# Altium PCB power reg.PcbDoc
Units mil, origin at the board's own origin, x right, y up, seen from the top; angles counter-clockwise.
Board outline 2875 x 1655 mil, 2 copper layers (Top Layer, Bottom Layer); 8 components, 5 nets, 24 pads, 0 vias.
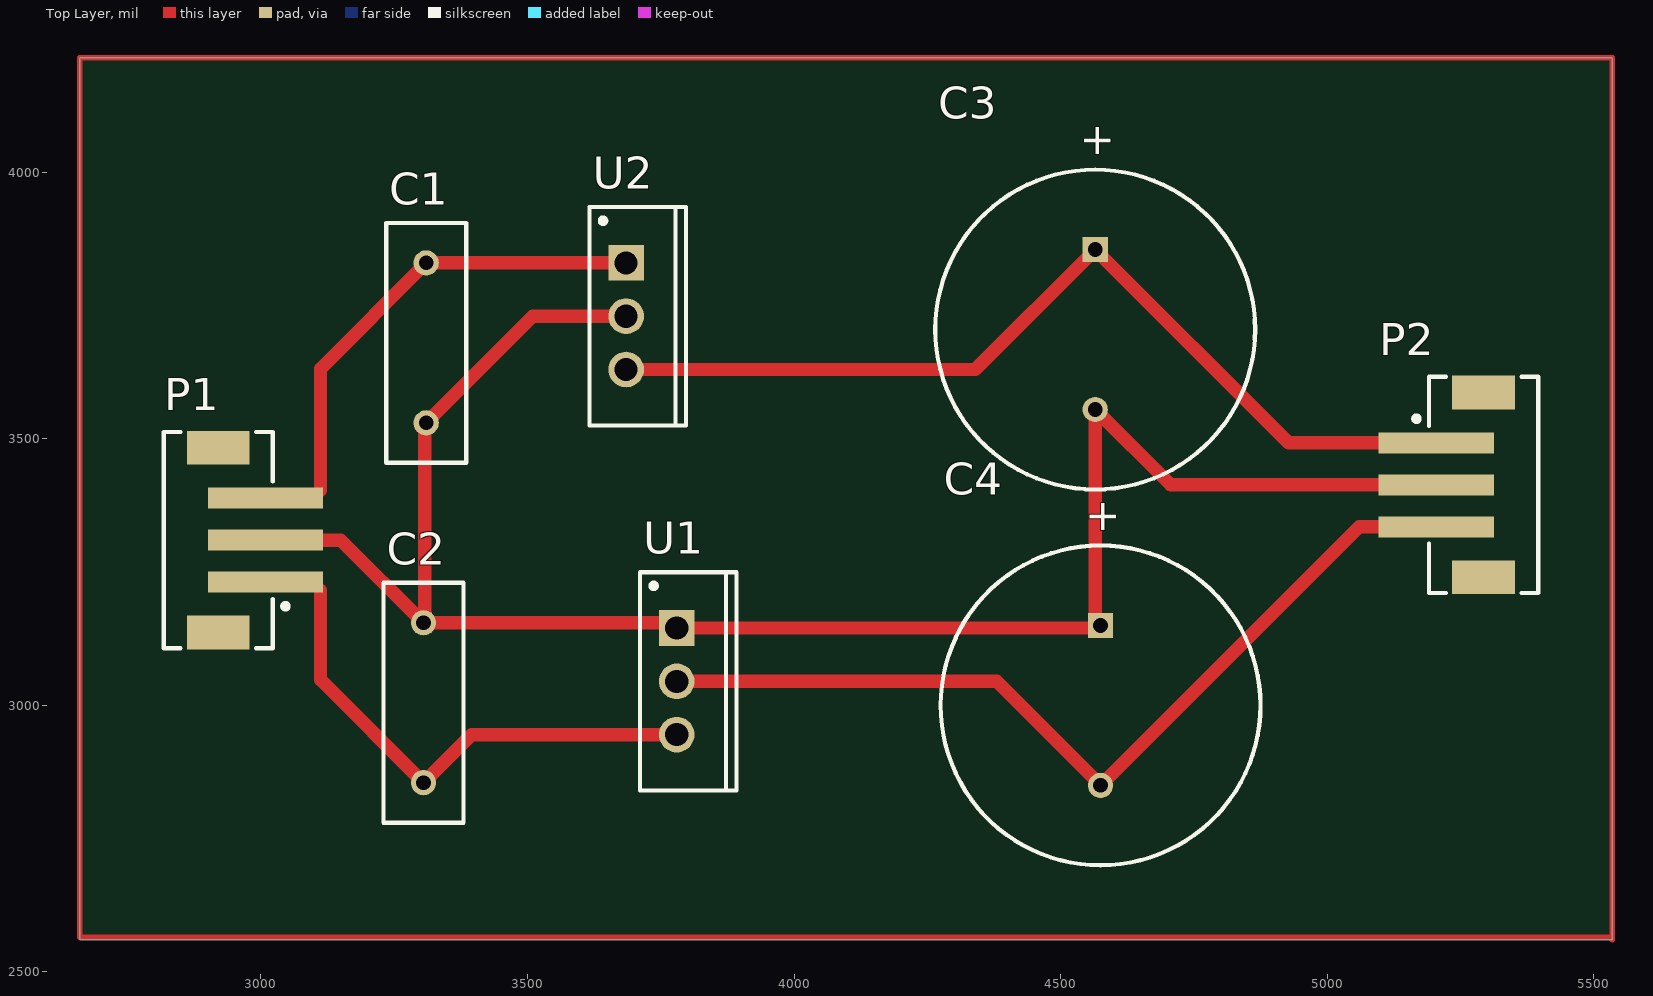
[diagram p0: Top Layer view]
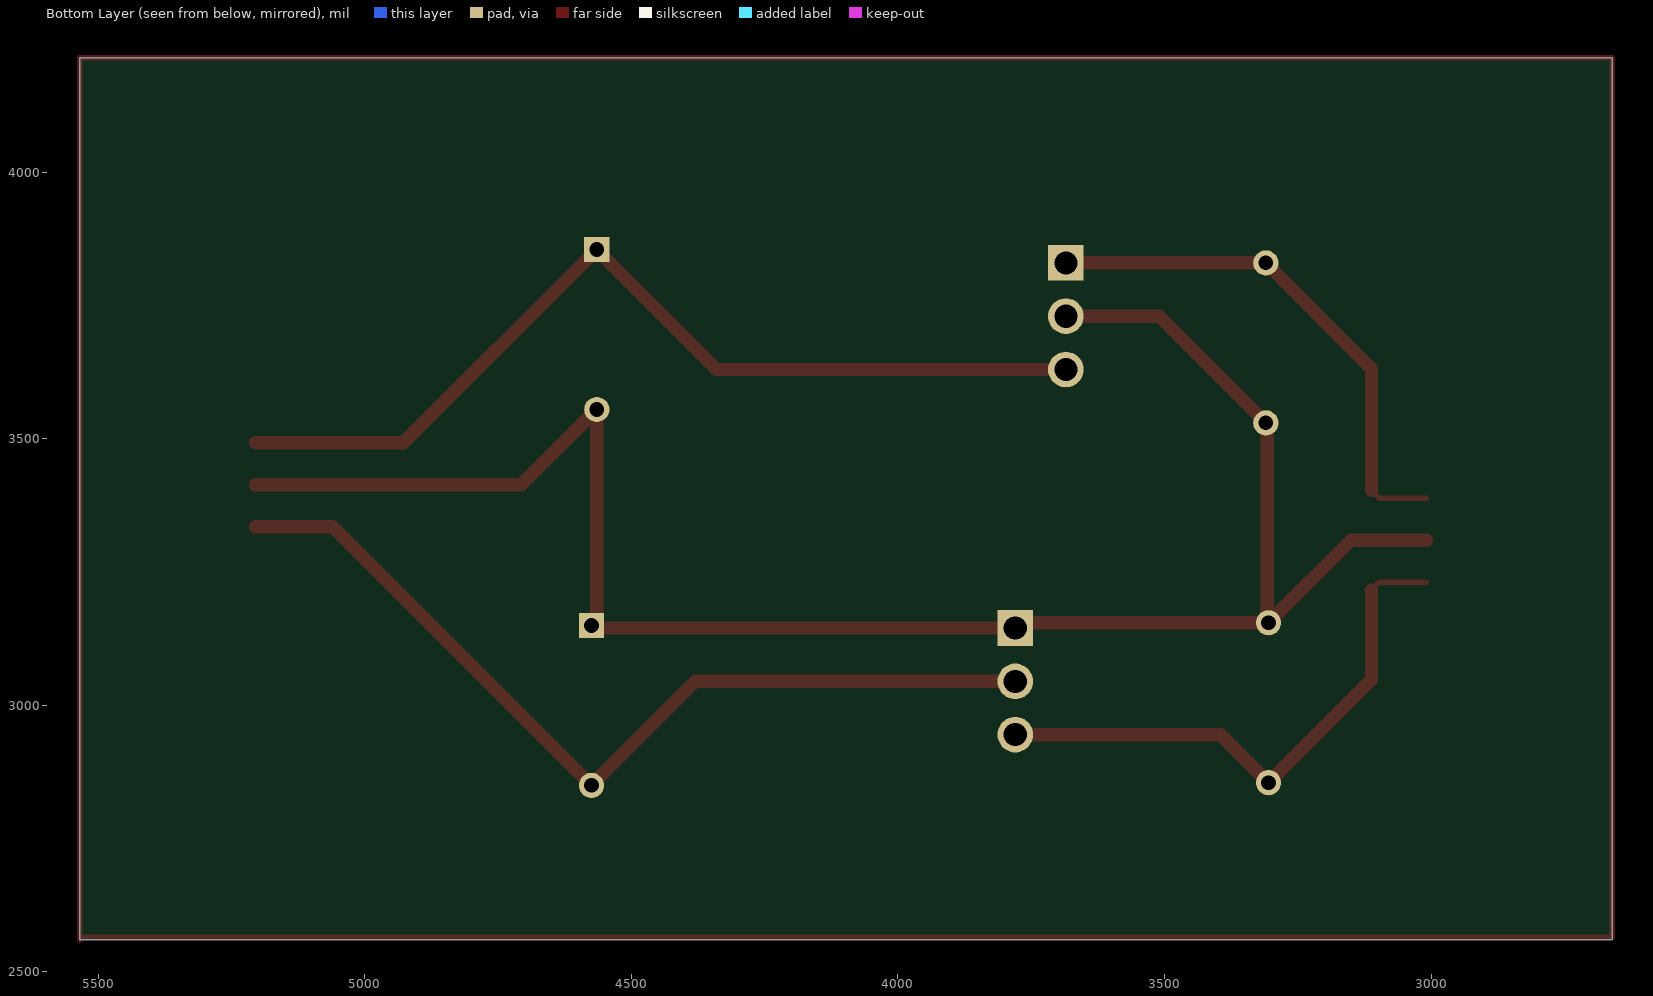
[diagram p1: Bottom Layer view, seen from below]

## Layer stack, top to bottom
Top Solder: solder mask 0.4, Solder Resist, Dk 3.5
Top Layer: signal copper 1.4
Dielectric 1: dielectric 12.6, FR-4, Dk 4.8
Bottom Layer: signal copper 1.4
Bottom Solder: solder mask 0.4, Solder Resist, Dk 3.5

## Board outline
2660,2560 5535,2560 5535,4215 2660,4215

## Design rules (kind name [scope] priority, off if disabled: settings)
Clearance "Clearance Bottom Layer" [OnLayer('Bottom Layer')] p1: gap=8 ignorepadtopadclearanceinfootprint=TRUE except(10: Arc-Text Track-Text SMDPad-Text THPad-Text Via-Text Fill-Text Poly-Text Region-Text Text-Text)
Clearance "Clearance Top Layer" [OnLayer('Top Layer')] p2: gap=8 ignorepadtopadclearanceinfootprint=TRUE except(10: Arc-Text Track-Text SMDPad-Text THPad-Text Via-Text Fill-Text Poly-Text Region-Text Text-Text)
Clearance [All] p3: gap=7.87 ignorepadtopadclearanceinfootprint=FALSE except(3.5: Arc-Arc Arc-Track Arc-SMDPad Track-Track Track-SMDPad SMDPad-SMDPad; 5: Arc-Via Track-Via SMDPad-Via THPad-Via Via-Via; 10: Arc-Text Track-Text SMDPad-Text THPad-Text Via-Text Fill-Text Poly-Text Region-Text Text-Text)
PolygonConnect [All] p1: connectstyle=Relief reliefconductorwidth=10 reliefentries=4 polygonreliefangle="90 Angle" airgapwidth=10
RoutingVias [All] p1: holewidth=28 width=50 viastyle="Through Hole" minholewidth=28 minwidth=50 maxholewidth=28 maxwidth=50
SolderMaskExpansion [All] p1: expansion=4 istentingtop=FALSE
Width [All] p1: maxlimit=10 minlimit=10 preferedwidth=10
30 further rules are at their usual default settings.

## Classes and differential pairs
component class "power reg": C4 P1 P2 U1 U2

## Components (designator, comment, footprint, x,y, rotation, side; value= is the part's Value field where it differs from the comment)
C1 "Cap" RAD-0.3 3310,3680 r90 top value=100nF
C2 "Cap" RAD-0.3 3305,3005 r90 top value=100nF
C3 "Cap Pol1" RB7.6-15 4565,3705 r90 top value=220uF
C4 "Cap Pol1" RB7.6-15 4575,3000 r90 top value=220uF
P1 "620303124022" 620303124022 2920,3310 r270 top
P2 "620303124022" 620303124022 5293.58,3413.74 r90 top
U1 "L7912CV" TO-220 3780,3045 r270 top
U2 "L7812CV" TO220 3685,3730 r270 top

## Footprints (in the part's own frame and the unit in brackets; to place one, negate y for a bottom-side part, rotate by r counter-clockwise, add the part's x,y. Pads: shape width x height; smd on the part's side, far side on the other; paste and mask are expansions set on the pad)
620303124022 [mm] "2.00mm SMT Male Vertical Shrouded Header, 3p"
  rect 1x5.5 smd: 1(2,2.25) 2(0,2.25) 3(-2,2.25)
  rect 1.6x3 smd: MP1(-4.4,0) MP2(4.4,0)
  silkscreen extent -5.15,-2.6 5.15,3.32, body extent -5,-2.5 5,4.51, height 6.77
RAD-0.3 [mm] "Radial Cap, Thru-Hole; 2 Leads; 0.3 in Pin Spacing"
  round 1.2 hole 0.7: 1(-3.81,0) 2(3.81,0)
  silkscreen extent -5.71,-1.91 5.71,1.91
RB7.6-15 [mm] "Polarized Capacitor (Radial); 2 Leads"
  rect 1.2x1.2 hole 0.7: 1(3.81,0)
  round 1.2 hole 0.7: 2(-3.81,0)
  silkscreen extent -7.62,-7.62 7.62,7.62
TO220 [mm] "TO, Thru-Hole, Vertical, Heatsink Mounted; 3 In-Line Leads; Pitch 2.54 mm"
  rect 1.7x1.7 hole 1.1: 1(-2.54,0)
  round 1.7 hole 1.1: 2(0,0) 3(2.54,0)
  silkscreen extent -5.2,-1.75 5.2,2.85, body extent -5.25,-1.8 5.25,2.9, height 19.7
TO-220 [mm] "TO, Thru-Hole, Vertical, Heatsink Mounted; 3 In-Line Leads; Pitch 2.54 mm"
  rect 1.7x1.7 hole 1.1: 1(-2.54,0)
  round 1.7 hole 1.1: 2(0,0) 3(2.54,0)
  silkscreen extent -5.2,-1.75 5.2,2.85, body extent -5.25,-1.8 5.25,2.9, height 19.7

## Part data
C1 C2: "Capacitor", LatestRevisionDate=17-Jul-2002, LatestRevisionNote="Re-released for DXP Platform.", PackageDescription="Radial Cap, Thru-Hole; 2 Leads; 0.3 in Pin Spacing", PackageReference=RAD-0.3, Published=8-Jun-2000, Publisher="Altium Limited"
C3 C4: "Polarized Capacitor (Radial)", LatestRevisionDate=17-Jul-2002, LatestRevisionNote="Re-released for DXP Platform.", PackageDescription="Polarized Capacitor (Radial); 2 Leads", PackageReference=RB7.6-15, Published=8-Jun-2000, Publisher="Altium Limited"
P1 P2: library part CMP-1502-00661-1, "Male Shrouded Header WR-WTB, SMT, Vertical, pitch 2 mm, 1 x 3 position", Contact Resistance=20mOhm, Manufacturer="Wurth Elektronik", Operating Temperature=-25to85degC, Working Voltage=100VAC, Datasheet URL=https://katalog.we-online.de/em/datasheet/6203xx124022.pdf, Gender=Male, Manufacturer URL=http://www.we-online.de, Mounting Technology=SMT, Orientation=Vertical, Package Reference=620303124022, Packaging=TapeandReel, Part Number=620303124022, Pitch=2mm, Position=1x3, Publisher=WurthElektronik
U1: library part CMP-0244-00457-1, "Negative Voltage Regulator, -12V, 3-Pin TO-220", ComponentLink1Description="Manufacturer URL", ComponentLink1URL=http://www.st.com, ComponentLink2Description=Datasheet, ComponentLink2URL=http://www.st.com/internet/com/TECHNICAL_RESOURCES/TECHNICAL_LITERATURE/DATASHEET/CD00000450.pdf, DatasheetVersion=1/11/2011, PackageDescription="TO, Thru-Hole, Vertical, Heatsink Mounted; 3 In-Line Leads; Pitch 2.54 mm", PackageReference=TO-220, PackageVersion=2011
U2: library part CMP-0244-00450-1, "Positive Voltage Regulator, 12V, 3-Pin TO-220", ComponentLink1Description="Manufacturer URL", ComponentLink1URL=http://www.st.com, ComponentLink2Description=Datasheet, ComponentLink2URL=http://www.st.com/internet/com/TECHNICAL_RESOURCES/TECHNICAL_LITERATURE/DATASHEET/CD00000444.pdf, ComponentLink3Description="Package Specification", ComponentLink3URL=http://www.st.com/internet/com/TECHNICAL_RESOURCES/TECHNICAL_LITERATURE/PACKAGE_INFORMATION/CD00004649.pdf, DatasheetVersion=16/11/2011, PackageDescription="TO, Thru-Hole, Vertical, Heatsink Mounted; 3 In-Line Leads; Pitch 2.54 mm", PackageReference=TO220, PackageVersion=ver3.0

## Nets (pads, with @x,y where several pads share a name; then routed paths per layer and width w, separated by ;. In a path a pad name is that pad's centre, name@x,y a point inside that pad or via, vN(x,y) a via of type N, cw(c..) or ccw(c..) an arc to the next point about the centre after c; other vN are vias at no path point)
+12: C1.2 P1.3 U2.1 | length 993
  Top Layer w10: P1.3 3097.17,3388.74 P1.3@3111.85,3403.43
  Top Layer w25: P1.3@3111.85,3403.43 3111.85,3631.85 C1.2 U2.1
-12: C2.1 P1.1 U1.3 | length 1063.2
  Top Layer w10: P1.1 3097.17,3231.26 P1.1@3111.85,3216.57
  Top Layer w25: P1.1@3111.85,3216.57 3111.85,3048.15 C2.1 3395,2945 U1.3
GND: C1.1 C2.2 C3.2 C4.1 P1.2 P2.2 U1.1 U2.2 | length 3582.9
  Top Layer w10: C2.2@3297.5,3142.5 C2.2@3300,3145 ; C2.2 C2.2@3307.5,3157.5 ; C1.1@3307.5,3527.5 C1.1 ; U1.1@3770,3155 U1.1 ; C4.1@4565,3160 C4.1 C4.1@4570,3145
  Top Layer w25: P1.2 3150,3310 C2.2 U1.1@3770,3155 ; C2.2@3307.5,3157.5 C1.1@3307.5,3527.5 ; C1.1 3510,3730 U2.2 ; U1.1 C4.1@4570,3145 ; C4.1@4565,3160 C3.2 4706.26,3413.74 P2.2
NetC3_1: C3.1 P2.1 U2.3 | length 1763.4
  Top Layer w25: U2.3 4340,3630 C3.1 4927.52,3492.48 P2.1
NetC4_2: C4.2 P2.3 U1.2 | length 1706.7
  Top Layer w25: U1.2 4380,3045 C4.2 5060,3335 P2.3
pads on no net: P1.MP1 P1.MP2 P2.MP1 P2.MP2
copper on no net: | length 9057.1
  Top Layer w10: 2660,2565 2660,4215 5535,4215 5535,2560 5530,2565 2660,2565

## Text inside footprints (layer, text, board x,y; h text height)
C3: Top Overlay "+" at 4594.01,4025.15 h59.06 r90
C4: Top Overlay "+" at 4604.01,3320.15 h59.06 r90